# Altium PCB PCB_Board ESP32S 3-XYZ copy_2021-06-29.pcbdoc
Units mm, origin at the board's own origin, x right, y up, seen from the top; angles counter-clockwise.
Board outline 251.21 x 149.35 mm, 2 copper layers (Top Layer, Bottom Layer); 73 components, 87 nets, 284 pads, 21 vias.
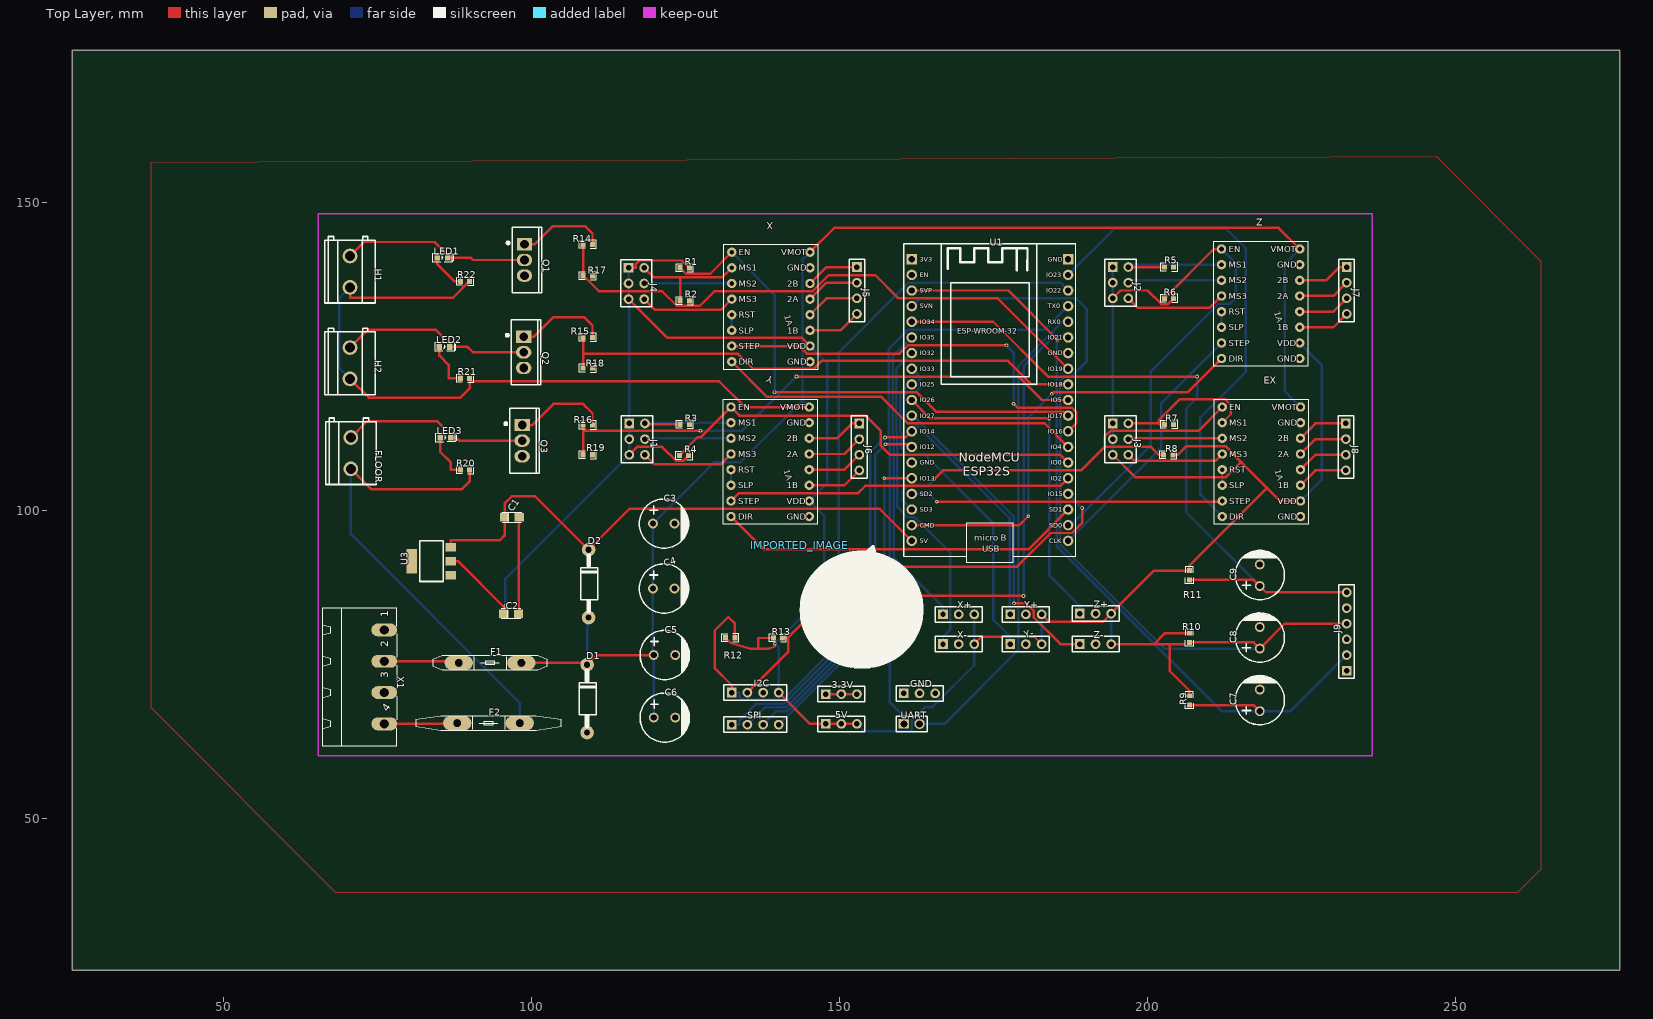
[diagram p0: Top Layer view]
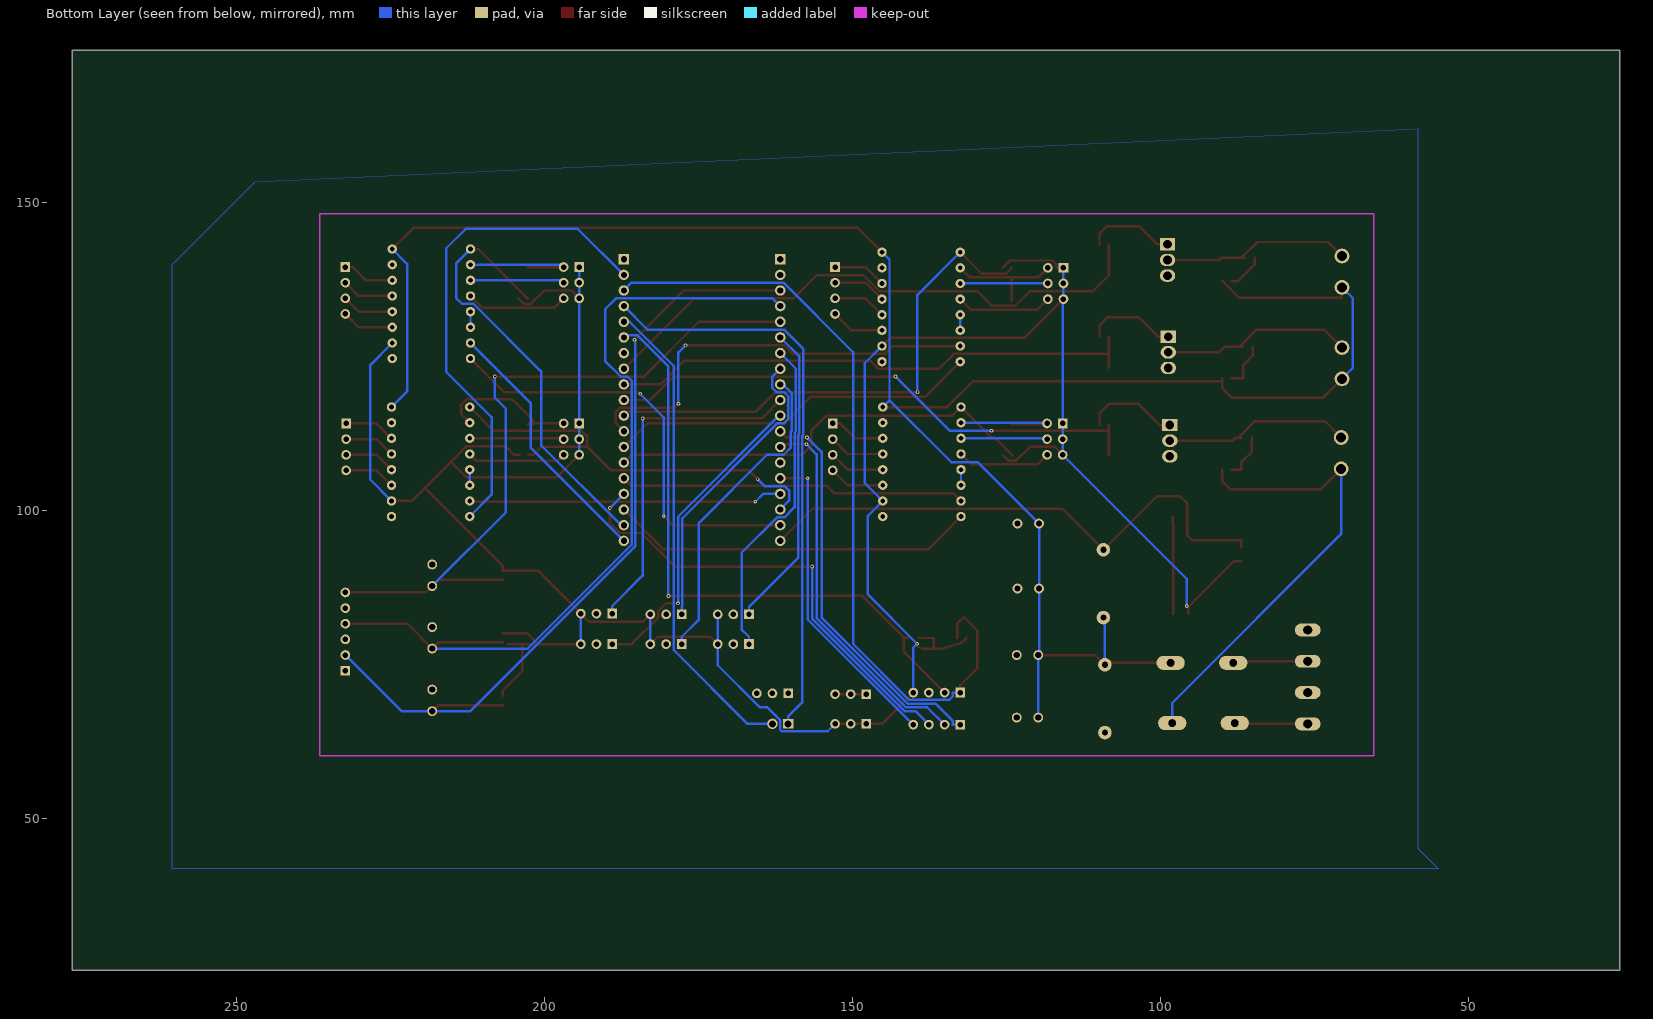
[diagram p1: Bottom Layer view, seen from below]

## Layer stack, top to bottom
Top Layer: signal copper (thickness not stored)
Dielectric: dielectric 0.32, FR-4, Dk 4.8
Bottom Layer: signal copper (thickness not stored)

## Board outline
276.606,25.4 25.4,25.4 25.4,174.752 276.606,174.752

## Components (designator, comment, footprint, x,y, rotation, side; value= is the part's Value field where it differs from the comment)
3.3V "HDR-M-2.54_1x3" HDR-M-2.54_1X3 150.241,70.231 r0 top
5V "HDR-M-2.54_1x3" HDR-M-2.54_1X3 150.241,65.405 r0 top
C1 "100u/16V" CASE-A_3216 96.774,98.933 r0 top
C2 "22u/16V" CASE-A_3216 96.647,83.312 r0 top
C3 "100u" CAP-D8.0×F3.5 121.412,97.917 r0 top
C4 "100u" CAP-D8.0×F3.5 121.412,87.376 r0 top
C5 "100u" CAP-D8.0×F3.5 121.539,76.581 r0 top
C6 "100u" CAP-D8.0×F3.5 121.539,66.421 r0 top
C7 "10u" CAP-D8.0×F3.5 218.186,69.215 r90 top
C8 "10u" CAP-D8.0×F3.5 218.186,79.375 r90 top
C9 "10u" CAP-D8.0×F3.5 218.186,89.535 r90 top
D1 "1N4004" "DIODE LEAD SP 11MM" 108.966,64.008 r0 top
D2 "1N4004" "DIODE LEAD SP 11MM" 109.22,82.677 r0 top
EX "A4988" "A4988 STEPPER MOTOR DRIVER CARRIER" 218.44,107.95 r0 top
F1 "MFR500" MFR500 93.218,75.311 r0 top
F2 "MFR1100" MFR1100 92.964,65.532 r0 top
FLOOR "CONN-TH_2P-P5.08" CONN-TH_2P-P5.08 70.612,109.347 r270 top
GND "HDR-M-2.54_1x3" HDR-M-2.54_1X3 162.941,70.358 r0 top
H1 "CONN-TH_2P-P5.08" CONN-TH_2P-P5.08 70.485,138.811 r270 top
H2 "CONN-TH_2P-P5.08" CONN-TH_2P-P5.08 70.485,123.952 r270 top
I2C "HDR-M-2.54_1x4" HDR-M-2.54_1X4 136.271,70.485 r0 top
IMPORTED_IMAGE "IMPORTED_IMAGE" IMPORTED_IMAGE 143.531,94.41 r0 top
J1 "HDR-M-2.54_2x3" HDR-M-2.54_2X3 115.824,114.173 r270 top
J2 "HDR-M-2.54_2x3" HDR-M-2.54_2X3 194.31,139.573 r270 top
J3 "HDR-M-2.54_2x3" HDR-M-2.54_2X3 194.31,114.173 r270 top
J4 "HDR-M-2.54_2x3" HDR-M-2.54_2X3 115.697,139.446 r270 top
J5 "HDR-M-2.54_1x4" HDR-M-2.54_1X4 152.781,135.763 r270 top
J6 "HDR-M-2.54_1x4" HDR-M-2.54_1X4 153.162,110.363 r270 top
J7 "HDR-M-2.54_1x4" HDR-M-2.54_1X4 232.283,135.763 r270 top
J8 "HDR-M-2.54_1x4" HDR-M-2.54_1X4 232.156,110.363 r270 top
J9 "HDR-M-2.54_1x6" HDR-M-2.54_1X6 232.283,80.391 r90 top
LED1 "LED-0603_R" LED0603_RED 85.471,141.097 r0 top
LED2 "LED-0603_R" LED0603_RED 85.852,126.619 r0 top
LED3 "LED-0603_R" LED0603_RED 85.979,111.887 r0 top
Q1 "STP55NF06L" TO-220-3_L10.0-W4.5-P2.54-L 98.806,140.716 r270 top
Q2 "STP55NF06L" TO-220-3_L10.0-W4.5-P2.54-L 98.679,125.73 r270 top
Q3 "STP55NF06L" TO-220-3_L10.0-W4.5-P2.54-L 98.425,111.379 r270 top
R1 "10k" R0603 124.841,139.446 r0 top
R2 "100k" R0603 124.841,134.112 r0 top
R3 "100k" R0603 124.841,114.046 r0 top
R4 "10k" R0603 124.714,108.966 r0 top
R5 "100k" R0603 203.454,139.573 r0 top
R6 "10k" R0603 203.454,134.493 r0 top
R7 "100k" R0603 203.454,114.046 r0 top
R8 "10k" R0603 203.327,109.093 r0 top
R9 "4.7K" R0603 206.756,69.215 r90 top
R10 "4.7K" R0603 206.756,79.375 r90 top
R11 "4.7K" R0603 206.756,89.535 r90 top
R12 "4.7k" R0603 132.207,79.375 r0 top
R13 "4.7k" R0603 139.954,79.375 r0 top
R14 "10 Oh" R0603 109.093,143.256 r0 top
R15 "10 Oh" R0603 109.093,128.143 r0 top
R16 "10 Oh" R0603 109.093,113.919 r0 top
R17 "100k" R0603 109.093,138.176 r0 top
R18 "100k" R0603 109.093,123.19 r0 top
R19 "100k" R0603 109.093,109.093 r0 top
R20 "1.8K" R0603 89.154,106.68 r0 top
R21 "1.8K" R0603 89.154,121.539 r0 top
R22 "1.8K" R0603 89.154,137.287 r0 top
SPI "HDR-M-2.54_1x4" HDR-M-2.54_1X4 136.271,65.278 r0 top
U1 "NODEMCU_ESP32-DEVKITC" NODEMCU-ESP32S 159.131,145.923 r0 top
U3 "AMS1117" AMS1117 79.502,88.519 r90 top
UART "HDR-M-2.54_1x2" HDR-M-2.54_1X2 161.671,65.405 r0 top
X "A4988" "A4988 STEPPER MOTOR DRIVER CARRIER" 138.811,133.096 r0 top
X1 "CON-PHOENIX-508_MSTBA4" MSTBA4 71.882,73.406 r270 top
X+ "HDR-M-2.54_1x3" HDR-M-2.54_1X3 169.291,83.185 r0 top
X- "HDR-M-2.54_1x3" HDR-M-2.54_1X3 169.291,78.359 r0 top
Y "A4988" "A4988 STEPPER MOTOR DRIVER CARRIER" 138.684,107.95 r0 top
Y+ "HDR-M-2.54_1x3" HDR-M-2.54_1X3 180.213,83.185 r0 top
Y- "HDR-M-2.54_1x3" HDR-M-2.54_1X3 180.213,78.359 r0 top
Z "A4988" "A4988 STEPPER MOTOR DRIVER CARRIER" 218.313,133.604 r0 top
Z+ "HDR-M-2.54_1x3" HDR-M-2.54_1X3 191.516,83.312 r0 top
Z- "HDR-M-2.54_1x3" HDR-M-2.54_1X3 191.516,78.359 r0 top

## Footprints (in the part's own frame and the unit in brackets; to place one, negate y for a bottom-side part, rotate by r counter-clockwise, add the part's x,y. Pads: shape width x height; smd on the part's side, far side on the other; paste and mask are expansions set on the pad)
"A4988 STEPPER MOTOR DRIVER CARRIER" [mil]
  round 60 hole 30: 1(-250,350) 2(-250,250) 3(-250,150) 4(-250,50) 5(-250,-50) 6(-250,-150) 7(-250,-250) 8(-250,-350) 9(250,-350) 10(250,-250) 11(250,-150) 12(250,-50) 13(250,50) 14(250,150) 15(250,250) 16(250,350)
  silkscreen extent -300,-400 300,400
AMS1117 [mm]
  rect 1.4x1.7 smd: 1(1.016,-7.366) 2(3.302,-7.366) 3(5.588,-7.366)
  rect 4x1.7 smd: 4(3.302,-1.016)
  silkscreen extent 0,-6.1 6.6,-2.29
CAP-D8.0×F3.5 [mm]
  round 1.6 hole 1: 1(-1.75,0) 2(1.75,0)
  silkscreen extent -3.96,-4 4.04,4
CASE-A_3216 [mm]
  rect 1.5x1.359 smd: 1(-1.2,0) 2(1.2,0)
  silkscreen extent -1.64,-0.76 1.56,0.84
CONN-TH_2P-P5.08 [mm]
  round 2.4 hole 1.6: 1(-2.54,0) 2(2.54,0)
  silkscreen extent -5.72,-4.1 5.08,4.1
"DIODE LEAD SP 11MM" [mm]
  round 2.2 hole 1: A(0,-0.011) C(0,10.999)
  silkscreen extent -1.27,1 1.47,10
HDR-M-2.54_1X2 [mm]
  rect 1.7x1.575 hole 1.1: 1(-1.27,0)
  round 1.7 hole 1.1: 2(1.27,0)
  silkscreen extent -2.54,-1.27 2.54,1.27
HDR-M-2.54_1X3 [mil]
  rect 62x62 hole 35: 1(-100,0)
  round 62 hole 35: 2(0,0) 3(100,0)
  silkscreen extent -150,-50 150,50
HDR-M-2.54_1X4 [mil]
  rect 62x62 hole 35: 1(-150,0)
  round 62 hole 35: 2(-50,0) 3(50,0) 4(150,0)
  silkscreen extent -200,-50 200,50
HDR-M-2.54_1X6 [mil]
  rect 62x62 hole 35: 1(-250,0)
  round 62 hole 35: 2(-150,0) 3(-50,0) 4(50,0) 5(150,0) 6(250,0)
  silkscreen extent -300,-50 300,50
HDR-M-2.54_2X3 [mil]
  rect 62x62 hole 35: 1(0,0)
  round 62 hole 35: 2(0,100) 3(100,0) 4(100,100) 5(200,0) 6(200,100)
  silkscreen extent -50,-50 250,150
IMPORTED_IMAGE [mm]
  silkscreen extent 0,-20 20,0
LED0603_RED [mm]
  rect 0.9x1 smd: 1(-0.85,0) 2(0.85,0)
  silkscreen extent -1.54,-0.73 1.75,0.73
MFR500 [mm]
  oval 4.6x2.3 hole 1.2 slot 1.205 at 0 deg: 1(-5.08,0) 2(5.08,0)
  silkscreen extent -9.27,-1.14 9.27,1.14
MFR1100 [mm]
  oval 4.6x2.3 hole 1.2 slot 1.205 at 0 deg: 1(-5.08,0) 2(5.08,0)
  silkscreen extent -11.81,-1.14 11.81,1.14
MSTBA4 [mil]
  oval 82.5x165 hole 55 slot 55.2 at 90 deg: 1(-285.04,163.78) 2(-85.04,163.78) 3(114.96,163.78) 4(314.96,163.78)
  silkscreen extent -425,-231 455,244
NODEMCU-ESP32S [mm]
  rect 1.7x1.7 hole 1: 1(2.54,-5.08) 38(27.94,-5.08)
  round 1.7 hole 1: 2(2.54,-7.62) 3(2.54,-10.16) 4(2.54,-12.7) 5(2.54,-15.24) 6(2.54,-17.78) 7(2.54,-20.32) 8(2.54,-22.86) 9(2.54,-25.4) 10(2.54,-27.94) 11(2.54,-30.48) 12(2.54,-33.02) 13(2.54,-35.56) 14(2.54,-38.1) 15(2.54,-40.64) 16(2.54,-43.18) 17(2.54,-45.72) 18(2.54,-48.26) 19(2.54,-50.8) 20(27.94,-50.8) 21(27.94,-48.26) 22(27.94,-45.72) 23(27.94,-43.18) 24(27.94,-40.64) 25(27.94,-38.1) 26(27.94,-35.56) 27(27.94,-33.02) 28(27.94,-30.48) 29(27.94,-27.94) 30(27.94,-25.4) 31(27.94,-22.86) 32(27.94,-20.32) 33(27.94,-17.78) 34(27.94,-15.24) 35(27.94,-12.7) 36(27.94,-10.16) 37(27.94,-7.62)
  silkscreen extent 1.27,-54.32 29.21,-2.54
R0603 [mm]
  rect 0.806x0.864 smd: 1(-0.753,0) 2(0.753,0)
  silkscreen extent -1.39,-0.66 1.39,0.66
TO-220-3_L10.0-W4.5-P2.54-L [mm]
  rect 2x2.5 hole 1.4: 1(-2.54,0)
  oval 2x2.5 hole 1.4: 2(0,0) 3(2.54,0)
  silkscreen extent -5.3,-2.86 5.3,2.8

## Via types
v1: diameter 0.61, hole 0.305, Top Layer to Bottom Layer, 21 vias

## Nets (pads, with @x,y where several pads share a name; then routed paths per layer and width w, separated by ;. In a path a pad name is that pad's centre, name@x,y a point inside that pad or via, vN(x,y) a via of type N, cw(c..) or ccw(c..) an arc to the next point about the centre after c; other vN are vias at no path point)
3.3V: 3.3V.1 3.3V.2 3.3V.3 | length 5.1
  Top Layer w0.4: 3.3V.1 3.3V.2 3.3V.3
3V3: U1.1
5V: 5V.1 5V.2 5V.3 C2.1 EX.10 I2C.4 J1.1 J1.3 J1.5 J2.1 J2.3 J2.5 J3.1 J3.3 J3.5 J4.1 J4.3 J4.5 R1.2 R4.2 R6.2 R8.2 R9.2 R10.2 R11.2 R12.1 R13.1 U3.2 X+.3 X-.3 X.10 Y+.3 Y-.3 Y.10 Z+.3 Z-.3 Z.10 | length 476.5
  Top Layer w0.4: U3.2 87.97,91.821 88.02,91.821 95.447,84.394 95.447,84.293 ; C2.1 95.447,84.293 ; v1(95.686,84.532) 95.447,84.293 ; J4.5 121.941,128.122 143.785,128.122 X.10 ; J4.1 116.887,139.446 116.887,140.041 117.481,140.636 124.405,140.636 R1.2 ; J1.5 117.094,110.363 121.16,110.363 123.391,108.132 124.633,108.132 R4.2 ; R12.1 132.288,78.542 135.509,77.597 138.43,77.597 139.451,77.978 v1(139.45,78.419) ; 136.77,79.311 136.788,77.597 ; 136.779,79.341 R13.1 ; I2C.4 145.161,65.405 5V.1 5V.2 5V.3 ; X-.3 173.021,79.549 181.563,79.549 Y-.3 ; Y+.3 183.921,82.017 192.761,82.017 Z+.3 201.032,90.288 R11.2 206.756,91.094 219.373,103.711 ; Z-.3 205.828,78.359 ; J3.5 197.993,105.41 212.615,105.41 215.144,107.94 ; J2.5 195.58,135.763 199.981,135.763 202.197,133.547 203.261,133.547 R6.2 ; 204.064,78.359 203.581,78.359 203.581,73.95 206.756,70.775 ; R8.2 204.886,109.093 206.283,110.49 212.594,110.49 215.144,107.94 ; 205.829,78.359 201.041,78.359 202.811,80.129 R10.2 ; R9.2 206.756,70.774 ; EX.10 221.484,101.6 219.373,103.711 ; 215.144,107.94 219.373,103.711
  Bottom Layer w0.4: v1(95.686,84.532) 95.686,88.955 J1.5 J1.3 J1.1 115.824,134.239 J4.5 J4.3 J4.1 ; v1(139.45,78.419) 140.081,77.788 I2C.4 ; v1(139.45,78.419) 147.447,86.416 147.447,99.187 Y.10 147.955,104.521 147.955,123.952 X.10 ; 5V.3 153.971,64.215 161.436,64.215 161.653,64.433 161.653,65.956 163.824,68.126 165.037,68.126 171.831,74.92 X-.3 X+.3 ; Y-.3 Y+.3 ; Z-.3 Z+.3 ; J3.5 J3.3 J3.1 J2.5 J2.3 J2.1 ; Z.10 228.219,123.698 228.219,105.029 EX.10
12V: C3.1 C4.1 C5.1 C6.1 D1.C D2.A EX.16 F1.2 H1.2 H2.2 R21.2 R22.2 X.16 Y.16 Z.16 | length 348.8
  Top Layer w0.4: H2.2 73.533,118.364 88.392,118.364 89.908,119.88 89.908,121.008 130.429,121.008 134.597,116.84 Y.16 ; H1.2 70.485,134.62 87.241,134.62 R22.2 ; 89.907,121.007 R21.2 ; F1.2 108.661,75.311 D1.C 110.54,76.581 C5.1 ; X.16 149.098,145.923 221.234,145.923 Z.16
  Bottom Layer w0.4: H2.2 68.734,123.163 68.734,134.52 H1.2 ; D1.C 108.966,82.412 D2.A ; C6.1 C5.1 119.662,76.708 C4.1 C3.1 129.648,107.903 133.912,107.903 143.941,117.933 ; Y.16 143.941,117.933 ; X.16 143.941,140.766 143.941,117.933 ; Z.16 222.25,140.081 222.25,119.38 EX.16
12V2: F2.2 FLOOR.2 R20.2 | length 75.7
  Top Layer w0.4: FLOOR.2 73.914,103.505 88.646,103.505 89.908,104.767 R20.2
  Bottom Layer w0.4: FLOOR.2 70.612,96.212 98.044,68.78 F2.2
C2_2: C1.2 C2.2 | length 15.7
  Top Layer w0.4: C2.2@97.847,83.312 97.847,97.724 97.974,97.851 C1.2@97.974,98.933
CLK: SPI.1 U1.12 | length 65
  Top Layer w0.4: v1(157.342,111.917) 160.685,111.917 U1.12
  Bottom Layer w0.4: SPI.1 133.651,65.278 133.651,65.873 136.47,68.693 141.001,68.693 154.975,82.666 154.975,109.55 v1(157.342,111.917)
DIR_EX: EX.8 U1.37 | length 81.3
  Bottom Layer w0.4: U1.37 194.564,145.796 212.725,145.796 215.9,142.621 215.9,122.547 208.534,115.181 208.534,102.616 EX.8
DIR_X: U1.26 X.8 | length 60.3
  Top Layer w0.4: X.8 138.126,118.541 156.655,118.541 161.023,114.173 183.261,114.173 U1.26
DIR_Y: U1.22 Y.8 | length 59.6
  Top Layer w0.4: Y.8 137.661,93.733 180.601,93.733 U1.22
DIR_Z: U1.18 Z.8 | length 70.9
  Top Layer w0.4: U1.18 179.144,97.663 v1(180.593,99.112) ; v1(184.411,118.987) 184.678,119.253 206.502,119.253 Z.8
  Bottom Layer w0.4: v1(180.593,99.112) 180.593,115.168 v1(184.411,118.987)
EN_EX: EX.1 R8.1 U1.17 | length 72.2
  Top Layer w0.4: v1(165.341,105.131) 166.763,106.553 189.185,106.553 192.995,110.363 ; R8.1 201.768,109.093 200.498,110.363 192.995,110.363 ; EX.1 208.233,112.983 193.947,112.983 192.995,112.032 192.995,110.363
  Bottom Layer w0.4: U1.17 160.235,101.639 160.235,103.263 160.985,104.013 164.223,104.013 v1(165.341,105.131)
EN_X: R1.1 U1.28 X.1 | length 85.1
  Top Layer w0.4: R1.1 125.052,138.482 128.957,138.482 X.1 ; v1(139.411,119.253) 162.441,119.253 165.584,116.11 186.404,116.11 U1.28
  Bottom Layer w0.4: X.1 139.411,135.036 v1(139.411,119.253)
EN_Y: R4.1 U1.25 Y.1 | length 71.5
  Top Layer w0.4: R4.1 126.942,111.947 127.441,111.947 Y.1 133.71,115.464 154.177,115.464 156.635,113.007 156.635,110.6 158.16,109.075 185.819,109.075 U1.25
EN_Z: R6.1 U1.21 Z.1 | length 71
  Top Layer w0.4: R6.1 210.702,142.494 Z.1
  Bottom Layer w0.4: U1.21 187.543,97.663 200.515,110.635 200.515,122.641 211.478,133.604 213.36,133.604 214.249,134.493 214.249,140.208 Z.1
EX_2: EX.2 J3.2 R7.1 | length 23.4
  Top Layer w0.4: J3.2 201.807,114.173 ; R7.1 201.895,114.046 201.895,114.085 201.807,114.173 ; EX.2 213.466,115.676 213.466,117.211 212.557,118.12 205.212,118.12 201.807,114.715 201.807,114.173
EX_3: EX.3 J3.4 | length 15.3
  Top Layer w0.4: J3.4 196.977,111.76 EX.3
EX_4: EX.4 J3.6 | length 16.1
  Top Layer w0.4: J3.6 197.852,108.091 210.961,108.091 EX.4
EX_5: EX.5 EX.6 | length 2.5
  Bottom Layer w0.4: EX.6 EX.5
EX_11: EX.11 J8.4 | length 8.4
  Top Layer w0.4: EX.11 227.203,106.553 J8.4
EX_12: EX.12 J8.3 | length 8.4
  Top Layer w0.4: EX.12 227.203,109.093 J8.3
EX_13: EX.13 J8.2 | length 8.4
  Top Layer w0.4: EX.13 227.203,111.633 J8.2
EX_14: EX.14 J8.1 | length 8.4
  Top Layer w0.4: EX.14 227.203,114.173 J8.1
FLOOR: R16.1 R19.1 U1.29 | length 88.8
  Top Layer w0.4: R19.1 108.34,112.983 ; R16.1 108.34,112.983 ; v1(127.39,112.983) 108.34,112.983 ; v1(142.954,121.793) 179.016,121.793 182.826,117.983 U1.29
  Bottom Layer w0.4: v1(127.39,112.983) 134.144,112.983 v1(142.954,121.793)
GND: C3.2 C4.2 C5.2 C6.2 C7.2 C8.2 C9.2 D1.A EX.9 EX.15 GND.1 GND.2 GND.3 I2C.3 J9.1 J9.3 J9.5 Q1.3 Q2.3 Q3.3 R2.2 R3.2 R5.2 R7.2 R17.2 R18.2 R19.2 U1.14 U1.32 U1.38 U3.1 X1.1 X1.3 X+.2 X-.2 X.9 X.15 Y+.2 Y-.2 Y.9 Y.15 Z+.2 Z-.2 Z.9 Z.15
H1: R14.1 R17.1 U1.31 | length 94.2
  Top Layer w0.4: R14.1 R17.1 110.88,135.636 121.16,135.636 123.518,133.278 127.284,133.278 129.642,135.636 145.578,135.636 148.195,138.252 155.744,138.252 159.503,134.493 175.641,134.493 U1.31
H2: R15.1 R18.1 U1.30 | length 86.8
  Top Layer w0.4: 108.339,125.476 133.487,125.476 135.938,123.025 145.743,123.025 147.053,124.333 177.328,124.333 181.138,120.523 U1.30 ; R18.1 108.34,125.476 R15.1
LED1_1: LED1.1 R22.1 | length 6
  Top Layer w0.4: LED1.1 84.62,140.043 87.376,137.287 87.594,137.287 ; 87.595,137.287 R22.1
LED2_1: LED2.1 R21.1 | length 7.6
  Top Layer w0.4: LED2.1 85.001,125.184 86.487,123.698 86.487,121.539 87.594,121.539 ; 87.595,121.539 R21.1
LED3_1: LED3.1 R20.1 | length 7.5
  Top Layer w0.4: LED3.1 85.128,109.563 86.868,107.823 86.868,106.68 87.594,106.68 ; 87.595,106.68 R20.1
MISO: SPI.2 U1.13 | length 61.3
  Top Layer w0.4: v1(157.427,110.808) 161.226,110.808 U1.13
  Bottom Layer w0.4: SPI.2 137.813,68.09 141.25,68.09 155.774,82.614 155.774,109.156 v1(157.427,110.808)
MOSI: SPI.4 U1.15 | length 51.6
  Top Layer w0.4: v1(157.218,105.283) U1.15
  Bottom Layer w0.4: SPI.4 140.143,65.278 157.218,82.353 v1(157.218,105.283)
Q1_2: H1.1 LED1.2 Q1.2 | length 30.9
  Top Layer w0.4: H1.1 72.771,143.637 84.206,143.637 LED1.2@86.746,141.097 ; LED1.2 86.747,141.097 87.173,141.097 90.043,141.097 90.424,140.716 Q1.2
Q2_2: H2.1 LED2.2 Q2.2 | length 31.4
  Top Layer w0.4: H2.1 73.406,129.413 84.333,129.413 LED2.2@87.127,126.619 ; LED2.2 87.128,126.619 87.554,126.619 89.535,126.619 90.424,125.73 Q2.2
Q3_2: FLOOR.1 LED3.2 Q3.2 | length 30.7
  Top Layer w0.4: FLOOR.1 73.279,114.554 84.587,114.554 LED3.2@87.254,111.887 ; LED3.2 87.255,111.887 87.681,111.887 88.189,111.379 Q3.2
R14_2: Q1.1 R14.2 | length 14.5
  Top Layer w0.4: Q1.1 100.458,143.256 ; 100.457,143.256 103.378,146.177 108.712,146.177 109.847,145.042 R14.2
R15_2: Q2.1 R15.2 | length 15
  Top Layer w0.4: Q2.1 100.331,128.27 ; 100.33,128.27 103.505,131.445 108.458,131.445 109.847,130.056 R15.2
R16_2: Q3.1 R16.2 | length 15.4
  Top Layer w0.4: Q3.1 100.077,113.919 ; 100.076,113.919 103.505,117.348 108.331,117.348 109.847,115.832 R16.2
RX: U1.34 UART.2 | length 78.2
  Bottom Layer w0.4: UART.2 166.981,65.405 178.975,77.399 178.975,123.534 186.124,130.683 U1.34
S$71: 
S$560: 
S$562: 
S$564: 
SCL: I2C.1 R12.2 U1.36 | length 129.9
  Top Layer w0.4: I2C.1 132.461,71.675 ; 132.461,71.674 129.667,74.468 129.667,80.518 131.889,82.74 132.961,81.669 R12.2
  Bottom Layer w0.4: I2C.1 133.651,70.485 ; 133.65,70.485 133.65,69.891 134.244,69.296 140.752,69.296 149.86,78.405 149.86,125.74 161.153,137.033 185.801,137.033 U1.36
SDA: I2C.2 R13.2 U1.33 | length 100.8
  Top Layer w0.4: I2C.2 141.605,77.089 141.605,79.375 R13.2@141.11,79.375 ; R13.2 R13.2@141.11,79.375 ; v1(179.824,86.18) 148.317,86.18 141.513,79.375 R13.2@141.11,79.375
  Bottom Layer w0.4: v1(179.824,86.18) 179.824,123.436 184.869,128.481 186.733,128.481 U1.33
SS: SPI.3 U1.23 | length 76
  Top Layer w0.4: v1(156.496,90.935) 178.787,90.935 184.246,96.393 187.72,96.393 189.342,98.015 v1(189.342,100.462)
  Bottom Layer w0.4: SPI.3 139.75,67.487 141.5,67.487 156.496,82.483 v1(156.496,90.935) ; U1.23 189.342,100.472 v1(189.342,100.462)
STEP_EX: EX.7 U1.16 | length 51
  Top Layer w0.4: v1(165.739,101.473) 211.963,101.473 EX.7
  Bottom Layer w0.4: U1.16 164.469,102.743 v1(165.739,101.473)
STEP_X: U1.27 X.7 | length 70
  Top Layer w0.4: X.7 143.436,126.746 144.653,125.529 159.696,125.529 161.022,126.855 v1(177.057,126.855) ; v1(178.206,117.379) 178.854,116.731 187.695,116.731 188.359,116.067 188.359,114.191 U1.27
  Bottom Layer w0.4: v1(177.057,126.855) 178.206,125.706 v1(178.206,117.379)
STEP_Y: U1.24 Y.7 | length 56.3
  Top Layer w0.4: Y.7 133.604,102.87 152.968,102.87 154.129,104.031 185.819,104.031 U1.24
STEP_Z: U1.20 Z.7 | length 42.4
  Bottom Layer w0.4: U1.20 202.203,110.255 202.203,117.494 Z.7
T1: C7.1 J9.2 R9.1 U1.3 | length 134.4
  Top Layer w0.4: U1.3 177.357,135.763 v1@185.347,127.773 ; R9.1 217.189,68.462 C7.1
  Bottom Layer w0.4: v1@185.347,127.773 185.181,127.607 185.181,94.26 211.976,67.465 C7.1 223.167,67.465 J9.2
  other v1: 185.347,127.773
T2: C8.1 J9.4 R10.1 U1.4 | length 137.4
  Top Layer w0.4: R10.1 217.189,78.622 C8.1 222.222,81.661 J9.4
  Bottom Layer w0.4: U1.4 162.941,134.493 188.341,134.493 190.119,132.715 190.119,124.338 187.574,121.793 186.454,121.793 185.783,121.122 185.783,94.511 202.669,77.625 C8.1
T3: C9.1 J9.6 R11.1 U1.5 | length 116.1
  Top Layer w0.4: U1.5 174.915,130.683 183.805,121.793 v1(208.018,121.793) ; R11.1 217.189,88.782 C9.1 219.23,86.741 J9.6
  Bottom Layer w0.4: v1(208.018,121.793) 208.018,118.356 206.248,116.586 206.248,99.723 C9.1
TX: U1.35 UART.1 | length 93.9
  Bottom Layer w0.4: UART.1 160.401,66.595 158.134,68.862 158.134,112.125 157.964,112.295 157.964,126.323 161.054,129.413 183.261,129.413 U1.35
VCC: C1.1 D2.C U1.19 U3.3 | length 90.5
  Top Layer w0.4: U3.3 86.868,95.21 ; 86.868,95.209 94.828,95.209 95.575,95.956 95.575,97.851 ; 95.574,97.851 95.574,98.392 95.574,98.903 C1.1 ; C1.1@95.575,98.903 95.575,101.163 96.774,102.362 100.533,102.362 D2.C ; D2.C 115.874,100.33 156.464,100.33 U1.19
X1_2: F1.1 X1.2 | length 12.2
  Top Layer w0.4: X1.2 87.883,75.566 F1.1
X1_4: F2.1 X1.4 | length 11.9
  Top Layer w0.4: X1.4 87.758,65.406 F2.1
X+: U1.6 X+.1 | length 49.6
  Bottom Layer w0.4: U1.6 158.567,125.039 158.567,112.544 158.737,112.375 158.737,92.389 166.751,84.375 X+.1
X-: U1.7 X-.1 | length 53.1
  Bottom Layer w0.4: U1.7 159.17,123.102 159.17,112.794 159.339,112.624 159.339,100.589 160.996,98.933 162.2,98.933 167.941,93.193 167.941,80.738 166.751,79.549 X-.1
X_2: J4.2 R2.1 X.2 | length 19.3
  Top Layer w0.4: J4.2 119.804,137.879 124.088,137.879 ; R2.1 124.088,137.879 ; X.2 130.894,137.879 124.088,137.879
X_3: J4.4 X.3 | length 14.2
  Bottom Layer w0.4: J4.4 X.3
X_4: J4.6 X.4 | length 15.7
  Top Layer w0.4: J4.6 119.976,132.627 130.722,132.627 X.4
X_5: X.5 X.6 | length 2.5
  Bottom Layer w0.4: X.6 X.5
X_11: J5.4 X.11 | length 8.7
  Top Layer w0.4: X.11 150.114,129.286 J5.4
X_12: J5.3 X.12 | length 8.7
  Top Layer w0.4: X.12 147.828,134.493 J5.3
X_13: J5.2 X.13 | length 8.7
  Top Layer w0.4: X.13 147.828,137.033 J5.2
X_14: J5.1 X.14 | length 8.7
  Top Layer w0.4: X.14 147.828,139.573 J5.1
Y+: U1.8 Y+.1 | length 50
  Bottom Layer w0.4: U1.8 162.959,121.775 162.959,119.899 162.313,119.253 161.04,119.253 160.383,118.596 160.383,114.886 161.096,114.173 162.181,114.173 177.561,98.794 177.561,84.487 177.673,84.375 Y+.1
Y-: U1.9 Y-.1 | length 52.2
  Bottom Layer w0.4: U1.9 161.244,120.523 159.781,119.06 159.781,113.035 159.941,112.873 159.941,110.261 161.11,109.093 163.83,109.093 174.879,98.044 174.879,82.342 177.673,79.548 ; Y-.1 177.673,79.549
Y_2: J1.2 R3.1 Y.2 | length 19.8
  Top Layer w0.4: J1.2 118.491,114.046 R3.1
  Bottom Layer w0.4: J1.2 118.491,114.3 Y.2
Y_3: J1.4 Y.3 | length 14
  Bottom Layer w0.4: J1.4 118.491,111.76 Y.3
Y_4: J1.6 Y.4 | length 15.3
  Top Layer w0.4: J1.6 119.928,107.529 130.643,107.529 Y.4
Y_5: Y.5 Y.6 | length 2.5
  Bottom Layer w0.4: Y.6 Y.5
Y_11: J6.4 Y.11 | length 9.1
  Top Layer w0.4: Y.11 150.749,104.14 J6.4
Y_12: J6.3 Y.12 | length 9.1
  Top Layer w0.4: Y.12 150.749,106.68 J6.3
Y_13: J6.2 Y.13 | length 9.1
  Top Layer w0.4: Y.13 150.749,109.22 J6.2
Y_14: J6.1 Y.14 | length 9.1
  Top Layer w0.4: Y.14 149.56,111.76 151.973,114.173 J6.1
Z+: U1.10 Z+.1 | length 57.3
  Top Layer w0.4: U1.10 164.664,114.99 v1(184.013,114.99)
  Bottom Layer w0.4: v1(184.013,114.99) 184.013,89.465 188.976,84.502 Z+.1
Z-: U1.11 Z-.1 | length 51.5
  Top Layer w0.4: v1(178.268,84.976) 180.26,84.976 181.483,83.753 181.483,82.682 185.806,78.359 Z-.1
  Bottom Layer w0.4: U1.11 161.856,115.443 178.268,99.031 v1(178.268,84.976)
Z_2: J2.2 R5.1 Z.2 | length 21.1
  Top Layer w0.4: J2.2 R5.1
  Bottom Layer w0.4: J2.2 197.231,139.954 Z.2
Z_3: J2.4 Z.3 | length 15.3
  Bottom Layer w0.4: J2.4 197.231,137.414 Z.3
Z_4: J2.6 Z.4 | length 16.6
  Top Layer w0.4: J2.6 198.399,132.944 210.033,132.944 Z.4
Z_5: Z.5 Z.6 | length 2.5
  Bottom Layer w0.4: Z.6 Z.5
Z_11: J7.4 Z.11 | length 8.5
  Top Layer w0.4: Z.11 230.124,129.794 J7.4
Z_12: J7.3 Z.12 | length 8.5
  Top Layer w0.4: Z.12 230.124,132.334 J7.3
Z_13: J7.2 Z.13 | length 8.5
  Top Layer w0.4: Z.13 230.124,134.874 J7.2
Z_14: J7.1 Z.14 | length 8.5
  Top Layer w0.4: Z.14 228.935,137.414 231.094,139.573 J7.1
pads on no net: U1.2 U3.4

## Polygon pours and split planes (outlines as drawn)
GND on Bottom Layer (solid): 58.166,162.052 58.166,45.212 54.864,41.91 260.35,41.91 260.35,139.954 246.888,153.416
GND on Top Layer (solid): 38.1,156.464 38.1,68.072 68.072,38.1 260.096,38.1 263.906,41.91 263.906,140.462 246.888,157.48

## Text inside footprints (layer, text, board x,y; h text height)
EX: Top Overlay "MS1" at 213.233,113.792 h1.02; Top Overlay "MS2" at 213.233,111.252 h1.02; Top Overlay "MS3" at 213.233,108.712 h1.02; Top Overlay "STEP" at 213.233,101.092 h1.02; Top Overlay "DIR" at 213.233,98.552 h1.02; Top Overlay "GND" at 221.107,98.552 h1.02; Top Overlay "VDD" at 221.107,101.092 h1.02; Top Overlay "1B" at 221.107,103.632 h1.02; Top Overlay "1A" at 220.619,106.54 h1.02 r286; Top Overlay "2A" at 221.107,108.712 h1.02; Top Overlay "2B" at 221.107,111.252 h1.02; Top Overlay "GND" at 221.107,113.792 h1.02; Top Overlay "VMOT" at 220.091,116.332 h1.02; Top Overlay "EN" at 213.233,116.332 h1.02; Top Overlay "RST" at 213.233,106.172 h1.02; Top Overlay "SLP" at 213.233,103.632 h1.02; Document "A4988 Stepper Motor Driver Carrier" at 202.057,119.507 h1.27
U1: Top Overlay "SD2" at 162.941,102.362 h0.76; Top Overlay "USB" at 173.101,93.353 h1; Top Overlay "micro B" at 171.831,95.131 h1; Top Overlay "ESP-WROOM-32" at 169.037,128.709 h0.9; Top Overlay "IO13" at 162.941,104.902 h0.76; Top Overlay "GND" at 162.941,107.442 h0.76; Top Overlay "IO12" at 162.941,109.982 h0.76; Top Overlay "IO14" at 162.941,112.522 h0.76; Top Overlay "IO27" at 162.941,115.062 h0.76; Top Overlay "IO26" at 162.941,117.602 h0.76; Top Overlay "IO25" at 162.941,120.142 h0.76; Top Overlay "IO33" at 162.941,122.682 h0.76; Top Overlay "IO32" at 162.941,125.222 h0.76; Top Overlay "IO35" at 162.941,127.762 h0.76; Top Overlay "IO34" at 162.941,130.302 h0.76; Top Overlay "SVN" at 162.941,132.842 h0.76; Top Overlay "SVP" at 162.941,135.382 h0.76; Top Overlay "RX0" at 183.769,130.302 h0.76; Top Overlay "IO15" at 183.769,102.362 h0.76; Top Overlay "IO2" at 184.277,104.902 h0.76; Top Overlay "IO0" at 184.277,107.442 h0.76; Top Overlay "IO4" at 184.277,109.982 h0.76; Top Overlay "IO16" at 183.769,112.522 h0.76; Top Overlay "IO17" at 183.769,115.062 h0.76; Top Overlay "IO5" at 184.277,117.602 h0.76; Top Overlay "IO18" at 183.769,120.142 h0.76; Top Overlay "IO19" at 183.769,122.682 h0.76; Top Overlay "GND" at 183.769,125.222 h0.76; Top Overlay "IO21" at 183.769,127.762 h0.76; Top Overlay "TX0" at 183.769,132.842 h0.76; Top Overlay "IO22" at 183.515,135.382 h0.76; Top Overlay "IO23" at 183.515,137.922 h0.76; Top Overlay "EN" at 162.941,137.922 h0.76; Top Overlay "SD1" at 184.023,99.822 h0.76; Top Overlay "SD0" at 184.023,97.282 h0.76; Top Overlay "GND" at 183.769,140.462 h0.76; Top Overlay "3V3" at 162.941,140.462 h0.76; Top Overlay "SD3" at 162.941,99.822 h0.76; Top Overlay "CMD" at 162.941,97.282 h0.76; Top Overlay "NodeMCU /  ESP32S" at 169.291,105.676 h1.5; Top Overlay "CLK" at 184.023,94.742 h0.76; Top Overlay "5V" at 162.941,94.742 h0.76
X: Top Overlay "MS1" at 133.604,138.938 h1.02; Top Overlay "MS2" at 133.604,136.398 h1.02; Top Overlay "MS3" at 133.604,133.858 h1.02; Top Overlay "STEP" at 133.604,126.238 h1.02; Top Overlay "DIR" at 133.604,123.698 h1.02; Top Overlay "GND" at 141.478,123.698 h1.02; Top Overlay "VDD" at 141.478,126.238 h1.02; Top Overlay "1B" at 141.478,128.778 h1.02; Top Overlay "1A" at 140.99,131.686 h1.02 r286; Top Overlay "2A" at 141.478,133.858 h1.02; Top Overlay "2B" at 141.478,136.398 h1.02; Top Overlay "GND" at 141.478,138.938 h1.02; Top Overlay "VMOT" at 140.462,141.478 h1.02; Top Overlay "EN" at 133.604,141.478 h1.02; Top Overlay "RST" at 133.604,131.318 h1.02; Top Overlay "SLP" at 133.604,128.778 h1.02; Document "A4988 Stepper Motor Driver Carrier" at 122.428,144.653 h1.27
X1: Top Overlay "1" at 76.677,82.678 h1.27 r90; Top Overlay "2" at 76.677,77.852 h1.27 r90; Top Overlay "3" at 76.677,72.772 h1.27 r90; Top Overlay "4" at 76.556,67.319 h1.27 r54
Y: Top Overlay "MS1" at 133.477,113.792 h1.02; Top Overlay "MS2" at 133.477,111.252 h1.02; Top Overlay "MS3" at 133.477,108.712 h1.02; Top Overlay "STEP" at 133.477,101.092 h1.02; Top Overlay "DIR" at 133.477,98.552 h1.02; Top Overlay "GND" at 141.351,98.552 h1.02; Top Overlay "VDD" at 141.351,101.092 h1.02; Top Overlay "1B" at 141.351,103.632 h1.02; Top Overlay "1A" at 140.863,106.54 h1.02 r286; Top Overlay "2A" at 141.351,108.712 h1.02; Top Overlay "2B" at 141.351,111.252 h1.02; Top Overlay "GND" at 141.351,113.792 h1.02; Top Overlay "VMOT" at 140.335,116.332 h1.02; Top Overlay "EN" at 133.477,116.332 h1.02; Top Overlay "RST" at 133.477,106.172 h1.02; Top Overlay "SLP" at 133.477,103.632 h1.02; Document "A4988 Stepper Motor Driver Carrier" at 121.412,119.634 h1.27
Z: Top Overlay "MS1" at 213.106,139.446 h1.02; Top Overlay "MS2" at 213.106,136.906 h1.02; Top Overlay "MS3" at 213.106,134.366 h1.02; Top Overlay "STEP" at 213.106,126.746 h1.02; Top Overlay "DIR" at 213.106,124.206 h1.02; Top Overlay "GND" at 220.98,124.206 h1.02; Top Overlay "VDD" at 220.98,126.746 h1.02; Top Overlay "1B" at 220.98,129.286 h1.02; Top Overlay "1A" at 220.492,132.194 h1.02 r286; Top Overlay "2A" at 220.98,134.366 h1.02; Top Overlay "2B" at 220.98,136.906 h1.02; Top Overlay "GND" at 220.98,139.446 h1.02; Top Overlay "VMOT" at 219.964,141.986 h1.02; Top Overlay "EN" at 213.106,141.986 h1.02; Top Overlay "RST" at 213.106,131.826 h1.02; Top Overlay "SLP" at 213.106,129.286 h1.02; Document "A4988 Stepper Motor Driver Carrier" at 201.93,145.161 h1.27